# Altium PCB Sampler_DIOT.PCBDOC (part 8 of 10)
Units mm, origin at the board's own origin, x right, y up, seen from the top; angles counter-clockwise.
Board outline 222.9 x 100 mm, 4 copper layers (L1, P2, L3, L4), stack 1.6 mm thick; 697 components, 418 nets, 2175 pads, 1124 vias.
Unrouted connection lines stored in the file: 6.
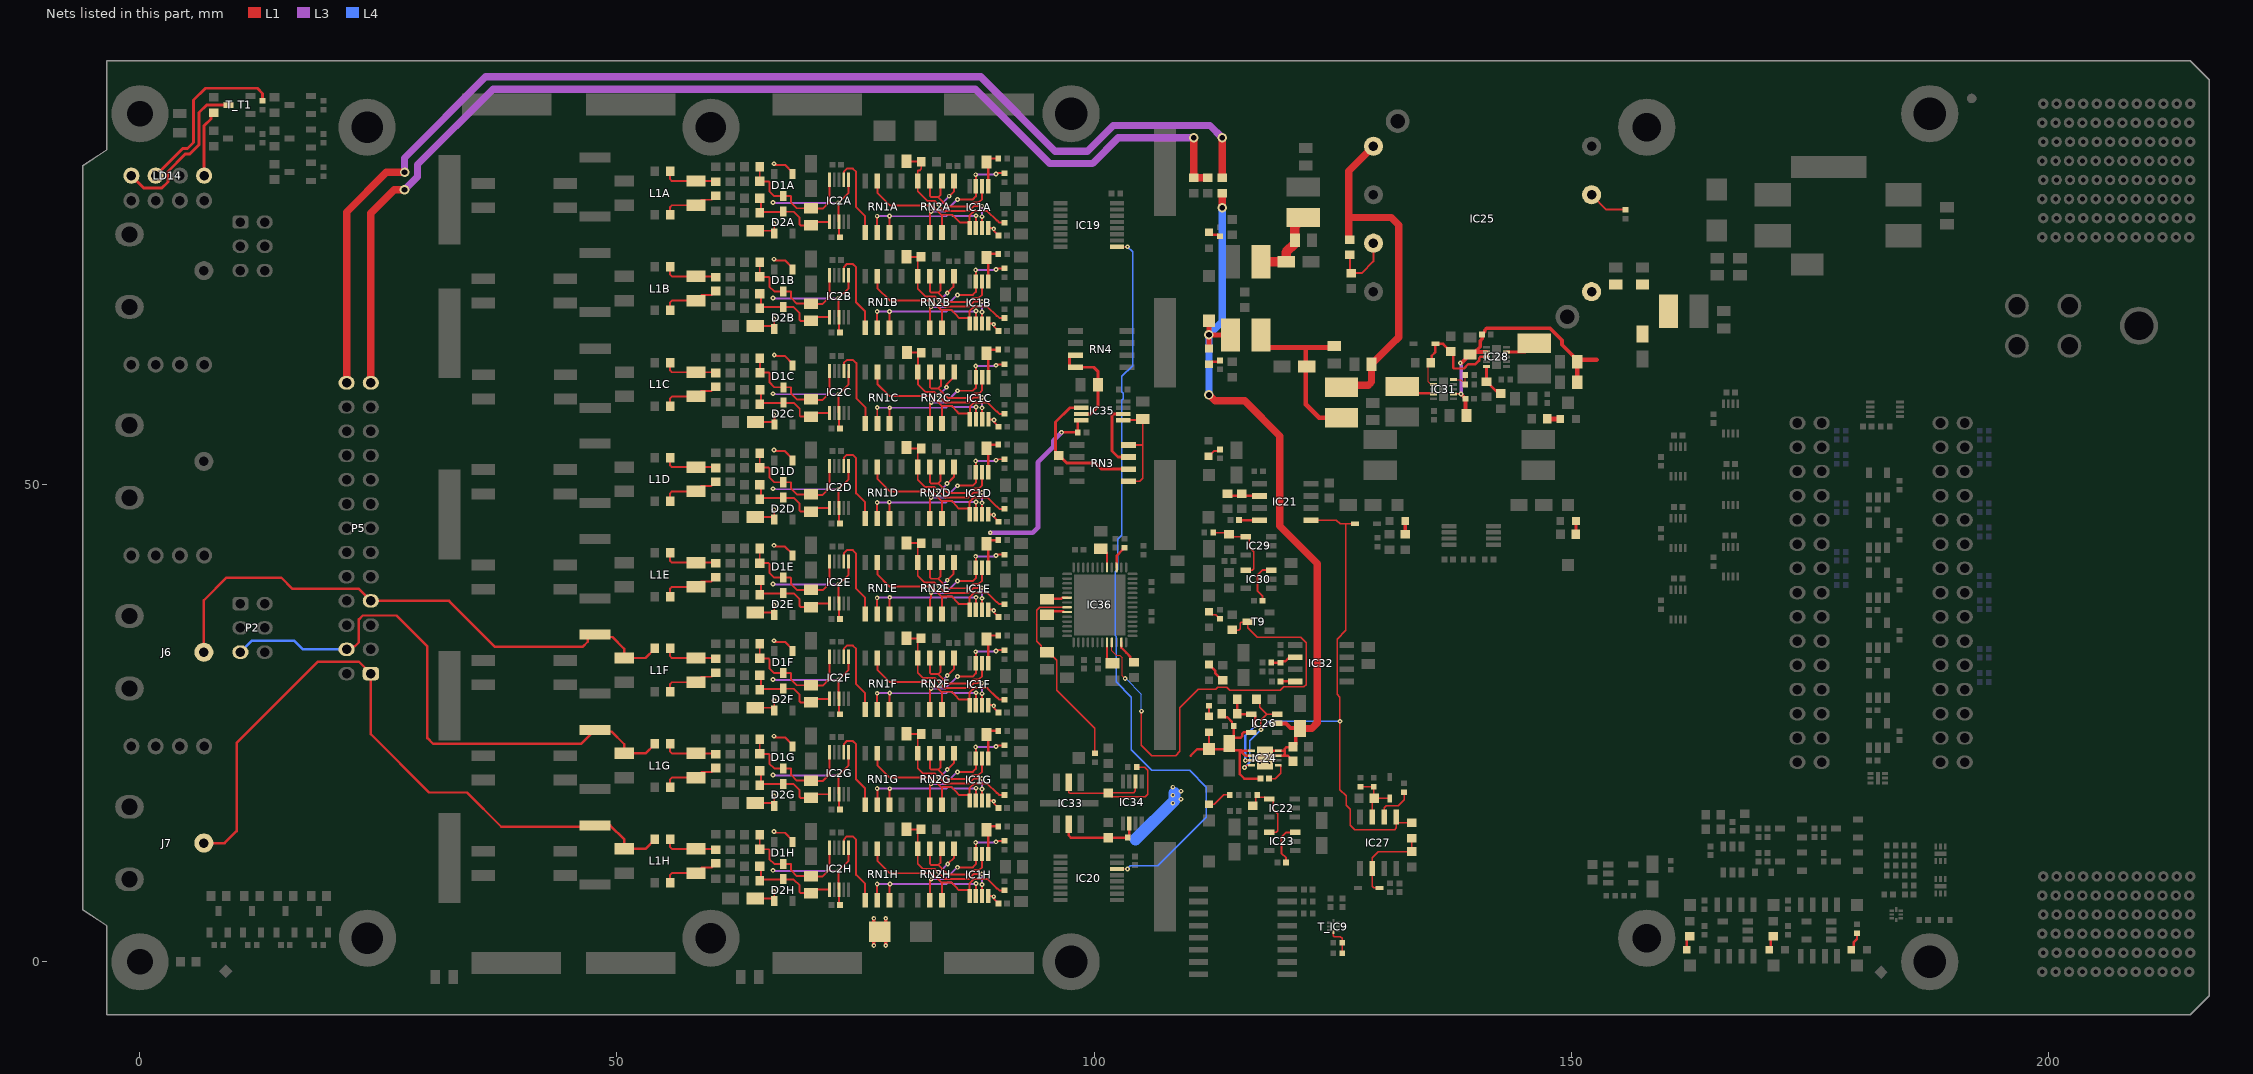
[diagram p8: the nets of this part, all layers, seen from the top]

## Via types
v1: diameter 0.5, hole 0.2, L1 to L4, tented both sides, 1103 vias
v2: diameter 1, hole 0.6, L1 to L4, tented both sides, 15 vias
v3: diameter 0.6, hole 0.3, L1 to L4, tented both sides, 6 vias

## Nets (pads, with @x,y where several pads share a name; then routed paths per layer and width w, separated by ;. In a path a pad name is that pad's centre, name@x,y a point inside that pad or via, vN(x,y) a via of type N, cw(c..) or ccw(c..) an arc to the next point about the centre after c; other vN are vias at no path point) (continued)
IN_P5: J6.1 L1F.1 P5.7 R1F.1 R5F.2 | length 59.5
  L1 w0.254: J6.1@6.7,32.45 6.7,37.9 9.075,40.275 14.8,40.275 15.95,39.125 22.905,39.125 P5.7@24.2,37.83 32.395,37.83 37.217,33.008 46.397,33.008 46.937,33.548 46.937,33.907 47.335,34.305 47.514,34.305 47.776,34.043 49.524,34.043 50.76,32.807 L1F.1@50.76,31.844 52.998,31.844 53.964,32.81 R1F.1@53.964,32.86
IN_P6: L1G.1 P2.5 P5.4 R1G.1 R5G.2 | length 60.9
  L1 w0.254: P5.4@21.66,32.75 22.12,32.75 22.435,33.065 22.516,33.065 22.95,33.5 22.95,35.9 23.35,36.3 26.875,36.3 30.13,33.045 30.13,23.445 30.739,22.836 46.225,22.836 R5G.2@47.694,24.305 ; R5G.2@47.669,24.142 49.425,24.142 50.76,22.807 50.76,21.978 50.894,21.844 52.998,21.844 53.964,22.81 R1G.1@53.964,22.86
  L4 w0.254: P2.5@10.53,32.46 11.745,33.675 16.15,33.675 17.075,32.75 P5.4@21.66,32.75
IN_P7: J7.1 L1H.1 P5.1 R1H.1 R5H.2 | length 73.5
  L1 w0.254: J7.1@6.7,12.45 8.875,12.45 10.125,13.7 10.125,22.95 18.65,31.475 22.935,31.475 23.615,30.795 23.615,30.766 24.171,30.21 P5.1@24.2,30.21 24.2,23.85 30.3,17.75 34.266,17.75 37.861,14.155 R5H.2@47.694,14.155 ; R5H.2@47.694,14.305 49.271,14.305 50.769,12.807 50.769,11.853 L1H.1@50.76,11.844 52.998,11.844 53.964,12.81 R1H.1@53.964,12.86
INT_I2C_OE: T_IC9.5 T_R5.2 T_R6.2 | length 3
  L1 w0.152: T_IC9.5@125.1,3.12 125.1,2.745 125.195,2.65 125.83,2.65 126.02,2.46 T_R6.2@126.02,2 T_R5.2@126.02,0.9
N12V0A: C10A.2 C10B.2 C10C.2 C10D.2 C10E.2 C10F.2 C10G.2 C10H.2 C11A.2 C11B.2 C11C.2 C11D.2 C11E.2 C11F.2 C11G.2 C11H.2 C14A.2 C14B.2 C14C.2 C14D.2 C14E.2 C14F.2 C14G.2 C14H.2 C46.2 C63.2 C64.2 C105.2 D1A.1 D1B.1 D1C.1 D1D.1 D1E.1 D1F.1 D1G.1 D1H.1 D2A.1 D2B.1 D2C.1 D2D.1 D2E.1 D2F.1 D2G.1 D2H.1 D6.2 IC1A.4 IC1B.4 IC1C.4 IC1D.4 IC1E.4 IC1F.4 IC1G.4 IC1H.4 IC2A.3 IC2A.6 IC2B.3 IC2B.6 IC2C.3 IC2C.6 IC2D.3 IC2D.6 IC2E.3 IC2E.6 IC2F.3 IC2F.6 IC2G.3 IC2G.6 IC2H.3 IC2H.6 IC24.1 IC24.2 IC26.5 IC35.4 LD12.1 R61.2 TP9.1 | length 217.2
  L1 w0.203: C11H.2@64.494,6.63 66.209,6.63 D2H.1@66.483,6.356 66.483,7.356 v1(66.444,7.395) ; C11G.2@64.494,16.63 66.209,16.63 D2G.1@66.483,16.356 66.483,17.356 v1(66.444,17.395) ; C11F.2@64.494,26.63 66.209,26.63 D2F.1@66.483,26.356 66.483,27.356 v1(66.444,27.395) ; C11E.2@64.494,36.63 66.209,36.63 D2E.1@66.483,36.356 66.483,37.356 v1(66.444,37.395) ; C11D.2@64.494,46.63 66.209,46.63 D2D.1@66.483,46.356 66.483,47.356 v1(66.444,47.395) ; C11B.2@64.494,66.63 66.209,66.63 D2B.1@66.483,66.356 66.483,67.356 v1(66.444,67.395) ; C11A.2@64.494,76.63 66.209,76.63 D2A.1@66.483,76.356 66.483,77.356 v1(66.444,77.395) ; C11C.2@64.507,56.586 66.222,56.586 D2C.1@66.496,56.312 66.496,57.312 v1(66.457,57.352) ; v1(66.468,13.653) 66.595,13.526 67.611,13.526 68.383,12.754 D1H.1@68.383,12.641 ; v1(66.468,23.653) 66.595,23.526 67.611,23.526 68.383,22.754 D1G.1@68.383,22.641 ; v1(66.468,33.653) 66.595,33.526 67.611,33.526 68.383,32.754 D1F.1@68.383,32.641 ; v1(66.468,43.653) 66.595,43.526 67.611,43.526 68.383,42.754 D1E.1@68.383,42.641 ; v1(66.468,53.653) 66.595,53.526 67.611,53.526 68.383,52.754 D1D.1@68.383,52.641 ; v1(66.468,73.653) 66.595,73.526 67.611,73.526 68.383,72.754 D1B.1@68.383,72.641 ; v1(66.468,83.653) 66.595,83.526 67.611,83.526 68.383,82.754 D1A.1@68.383,82.641 ; v1(66.481,63.609) 66.608,63.482 67.624,63.482 68.396,62.71 D1C.1@68.396,62.597 ; D1H.1@68.383,12.568 D1H.1@68.383,12.641 ; D1G.1@68.383,22.568 D1G.1@68.383,22.641 ; D1F.1@68.383,32.568 D1F.1@68.383,32.641 ; D1E.1@68.383,42.568 D1E.1@68.383,42.641 ; D1D.1@68.383,52.568 D1D.1@68.383,52.641 ; D1B.1@68.383,72.568 D1B.1@68.383,72.641 ; D1A.1@68.383,82.568 D1A.1@68.383,82.641 ; D1C.1@68.396,62.524 D1C.1@68.396,62.597 ; D1H.1@68.455,12.688 68.396,12.628 D1H.1@68.383,12.641 ; D1G.1@68.455,22.688 68.396,22.628 D1G.1@68.383,22.641 ; D1F.1@68.455,32.688 68.396,32.628 D1F.1@68.383,32.641 ; D1E.1@68.455,42.688 68.396,42.628 D1E.1@68.383,42.641 ; D1D.1@68.455,52.688 68.396,52.628 D1D.1@68.383,52.641 ; D1B.1@68.455,72.688 68.396,72.628 D1B.1@68.383,72.641 ; D1A.1@68.455,82.688 68.396,82.628 D1A.1@68.383,82.641 ; D1C.1@68.468,62.644 68.408,62.585 D1C.1@68.396,62.597 ; C10H.2@73.215,6.098 C10H.2@73.275,6.038 ; C10G.2@73.215,16.098 C10G.2@73.275,16.038 ; C10F.2@73.215,26.098 C10F.2@73.275,26.038 ; C10E.2@73.215,36.098 C10E.2@73.275,36.038 ; C10D.2@73.215,46.098 C10D.2@73.275,46.038 ; C10B.2@73.215,66.098 C10B.2@73.275,66.038 ; C10A.2@73.215,76.098 C10A.2@73.275,76.038 ; C10C.2@73.228,56.054 C10C.2@73.288,55.994 ; C10H.2@73.365,5.948 C10H.2@73.275,6.038 ; C10G.2@73.365,15.948 C10G.2@73.275,16.038 ; C10F.2@73.365,25.948 C10F.2@73.275,26.038 ; C10E.2@73.365,35.948 C10E.2@73.275,36.038 ; C10D.2@73.365,45.948 C10D.2@73.275,46.038 ; C10B.2@73.365,65.948 C10B.2@73.275,66.038 ; C10A.2@73.365,75.948 C10A.2@73.275,76.038 ; C10C.2@73.378,55.904 C10C.2@73.288,55.994 ; IC2H.6@74.275,11.967 74.275,10.596 v1(73.215,9.536) 73.215,8.7 73.227,8.688 73.227,7.615 73.275,7.567 C10H.2@73.275,6.038 ; IC2G.6@74.275,21.967 74.275,20.596 v1(73.215,19.536) 73.215,18.7 73.227,18.688 73.227,17.615 73.275,17.567 C10G.2@73.275,16.038 ; IC2F.6@74.275,31.967 74.275,30.596 v1(73.215,29.536) 73.215,28.7 73.227,28.688 73.227,27.615 73.275,27.567 C10F.2@73.275,26.038 ; IC2E.6@74.275,41.967 74.275,40.596 v1(73.215,39.536) 73.215,38.7 73.227,38.688 73.227,37.615 73.275,37.567 C10E.2@73.275,36.038 ; IC2D.6@74.275,51.967 74.275,50.596 v1(73.215,49.536) 73.215,48.7 73.227,48.688 73.227,47.615 73.275,47.567 C10D.2@73.275,46.038 ; IC2B.6@74.275,71.967 74.275,70.596 v1(73.215,69.536) 73.215,68.7 73.227,68.688 73.227,67.615 73.275,67.567 C10B.2@73.275,66.038 ; IC2A.6@74.275,81.967 74.275,80.596 v1(73.215,79.536) 73.215,78.7 73.227,78.688 73.227,77.615 73.275,77.567 C10A.2@73.275,76.038 ; IC2C.6@74.288,61.923 74.288,60.553 v1(73.228,59.493) 73.228,58.656 73.239,58.644 73.239,57.571 IC2C.3@73.288,57.523 C10C.2@73.288,55.994 ; IC1H.4@88.919,6.909 89.415,6.909 v1(89.494,6.83) 89.494,6.63 C14H.2@89.994,6.13 ; IC1G.4@88.919,16.909 89.415,16.909 v1(89.494,16.83) 89.494,16.63 C14G.2@89.994,16.13 ; IC1F.4@88.919,26.909 89.415,26.909 v1(89.494,26.83) 89.494,26.63 C14F.2@89.994,26.13 ; IC1E.4@88.919,36.909 89.415,36.909 v1(89.494,36.83) 89.494,36.63 C14E.2@89.994,36.13 ; IC1D.4@88.919,46.909 89.415,46.909 v1(89.494,46.83) 89.494,46.63 C14D.2@89.994,46.13 ; IC1B.4@88.919,66.909 89.415,66.909 v1(89.494,66.83) 89.494,66.63 C14B.2@89.994,66.13 ; IC1A.4@88.919,76.909 89.415,76.909 v1(89.494,76.83) 89.494,76.63 C14A.2@89.994,76.13 ; IC1C.4@88.932,56.865 89.428,56.865 v1(89.507,56.786) 89.507,56.586 C14C.2@90.007,56.086
  L1 w0.25: v1(96.6,55.5) C105.2@98.3,55.5 98.3,56.675 98.4,56.775 IC35.4@98.675,56.775 ; 110.125,21.6 110.815,22.29 TP9.1@112.05,22.29 ; LD12.1@112.05,24.075 TP9.1@112.05,22.29 ; R61.2@113.4,26.025 113.4,25.975 113.725,25.65 113.775,25.65 113.966,25.65 114.465,25.151 114.465,24.885 C64.2@114.65,24.7 C63.2@114.65,23.348 ; IC26.5@116.487,24.047 115.671,24.047 115.525,23.9 115.525,23.644 115.379,23.498 114.8,23.498 C63.2@114.65,23.348 ; IC24.2@116.512,21.61 116.071,21.61 116.069,21.612 115.838,21.612 115.55,21.9 115.55,22.054 ; IC24.1@116.512,22.11 115.606,22.11 115.55,22.054 ; C46.2@117.462,19.2 115.75,19.2 115.275,19.675 115.275,22.137 115.25,22.162 ; TP9.1@112.05,22.29 113.8,22.29 C63.2@114.3,22.79 ; C63.2@114.3,22.79 114.3,22.9 114.65,23.25 C63.2@114.65,23.348 ; C63.2@114.3,22.79 114.3,22.662 114.8,22.162 115.25,22.162 ; 115.25,22.162 115.441,22.162 115.55,22.054
  L1 w0.35: v1(76.919,1.7) D6.2@76.919,2.605 ; D6.2@76.919,3.655 v1(76.919,4.56) ; v1(78.169,1.7) D6.2@78.169,2.605 ; D6.2@78.169,3.655 v1(78.169,4.56)
  L3 w0.203: v1(66.341,9.589) 66.394,9.536 v1(73.215,9.536) ; v1(66.341,19.589) 66.394,19.536 v1(73.215,19.536) ; v1(66.341,29.589) 66.394,29.536 v1(73.215,29.536) ; v1(66.341,39.589) 66.394,39.536 v1(73.215,39.536) ; v1(66.341,49.589) 66.394,49.536 v1(73.215,49.536) ; v1(66.341,69.589) 66.394,69.536 v1(73.215,69.536) ; v1(66.341,79.589) 66.394,79.536 v1(73.215,79.536) ; v1(66.354,59.545) 66.406,59.493 v1(73.228,59.493)
  L3 w0.5: v1(89.125,44.975) 93.589,44.975 94.125,45.511 94.125,52.375 95.725,53.975 95.725,54.625 v1(96.6,55.5)
  L4 w1.27: 104.35,12.85 108.45,16.95 108.45,17.7
  other v1: 108.263,16.632 109.125,17.05 108.263,17.469 109.125,17.887 108.263,18.306
N13V0: C26.2 C61.2 C62.2 IC24.7 IC24.8 IC24.9 IC26.2 L6.2 LD13.1 R42.2 TP20.1 | length 80.4
  L1 w0.25: IC24.9@118.614,21.61 IC24.7@119.312,21.61 119.835,21.61 ; IC24.9@118.614,22.11 IC24.8@119.312,22.11 120.01,22.11 ; C26.2@120.878,21.01 120.878,21.035 120.303,21.61 119.835,21.61 ; C61.2@120.878,22.535 120.843,22.5 120.175,22.5 120.01,22.335 120.01,22.11 ; 119.835,21.61 120.01,21.785 120.01,22.11
  L1 w0.4: IC26.2@119.187,24.997 120.115,24.997 120.587,24.525 121.153,24.525 121.277,24.401 121.277,24.159 C62.2@121.578,24.46 121.578,24.185 121.152,23.759 121.152,22.809 C61.2@120.878,22.535
  L1 w0.5: LD13.1@112.05,64.285 v2(112.05,65.725) TP20.1@112.05,66.895
  L1 w0.508: v2(112.05,65.725) 112.075,65.7 L6.2@114.2,65.7
  L1 w0.762: v2(112.05,59.425) 112.676,58.799 115.802,58.799 119.481,55.12 119.481,45.684 123.405,41.76 123.405,25.055 122.81,24.46 C62.2@121.578,24.46 ; R42.2@113.444,80.58 113.444,79.081 v2@113.475,79.05
  L4 w0.762: v2(112.05,59.425) v2(112.05,65.725) 113.444,67.119 v2(113.444,79.055)
  other v1: 117.412,20.86 118.412,20.86 117.412,21.86 118.412,21.86
N13V0S: C58.2 IC25.4 L5.1 R58.1 | length 42.8
  L1 w0.203: L5.1@125.944,60.23 128.544,60.23 128.744,60.43 128.944,60.63 128.944,62.48 C58.2@129.094,62.63
  L1 w0.762: L5.1@125.944,60.23 126.144,60.43 128.744,60.43 ; R58.1@126.694,75.68 126.763,75.749 R58.1@126.813,75.749 ; R58.1@126.813,75.699 126.763,75.699 126.738,75.724 126.694,75.768 126.694,78.33 ; 128.944,60.63 129.094,60.78 C58.2@129.094,62.63 131.194,64.73 131.944,65.48 131.944,77.235 131.149,78.03 126.994,78.03 126.694,78.33 ; IC25.4@129.294,85.485 126.694,82.885 126.694,78.33
NetC1A_2: C1A.2 C2A.2 D1A.3 IC2A.10 R3A.2 | length 13.5
  L1 w0.203: R3A.2@64.962,83.322 C1A.2@64.962,81.798 65.903,81.798 65.983,81.718 65.983,80.768 66.483,80.268 D1A.3@67.433,80.268 68.202,80.268 68.246,80.224 68.246,79.589 68.845,78.99 C2A.2@70.329,78.99 70.365,78.954 71.548,78.954 72.275,79.681 IC2A.10@72.275,81.967
NetC1B_2: C1B.2 C2B.2 D1B.3 IC2B.10 R3B.2 | length 13.5
  L1 w0.203: R3B.2@64.962,73.322 C1B.2@64.962,71.798 65.903,71.798 65.983,71.718 65.983,70.768 66.483,70.268 D1B.3@67.433,70.268 68.202,70.268 68.246,70.224 68.246,69.589 68.845,68.99 C2B.2@70.329,68.99 70.365,68.954 71.548,68.954 72.275,69.681 IC2B.10@72.275,71.967
NetC1C_2: C1C.2 C2C.2 D1C.3 IC2C.10 R3C.2 | length 13.5
  L1 w0.203: R3C.2@64.975,63.278 C1C.2@64.975,61.754 65.916,61.754 65.996,61.674 65.996,60.724 66.496,60.224 D1C.3@67.446,60.224 68.215,60.224 68.259,60.18 68.259,59.545 68.857,58.947 C2C.2@70.341,58.947 70.378,58.91 71.561,58.91 72.288,59.637 IC2C.10@72.288,61.923
NetC1D_2: C1D.2 C2D.2 D1D.3 IC2D.10 R3D.2 | length 13.5
  L1 w0.203: R3D.2@64.962,53.322 C1D.2@64.962,51.798 65.903,51.798 65.983,51.718 65.983,50.768 66.483,50.268 D1D.3@67.433,50.268 68.202,50.268 68.246,50.224 68.246,49.589 68.845,48.99 C2D.2@70.329,48.99 70.365,48.954 71.548,48.954 72.275,49.681 IC2D.10@72.275,51.967
NetC1E_2: C1E.2 C2E.2 D1E.3 IC2E.10 R3E.2 | length 13.5
  L1 w0.203: R3E.2@64.962,43.322 C1E.2@64.962,41.798 65.903,41.798 65.983,41.718 65.983,40.768 66.483,40.268 67.433,40.268 68.202,40.268 68.246,40.224 68.246,39.589 68.845,38.99 C2E.2@70.329,38.99 70.365,38.954 71.548,38.954 72.275,39.681 IC2E.10@72.275,41.967
NetC1F_2: C1F.2 C2F.2 D1F.3 IC2F.10 R3F.2 | length 13.5
  L1 w0.203: R3F.2@64.962,33.322 C1F.2@64.962,31.798 65.903,31.798 65.983,31.718 65.983,30.768 66.483,30.268 D1F.3@67.433,30.268 68.202,30.268 68.246,30.224 68.246,29.589 68.845,28.99 C2F.2@70.329,28.99 70.365,28.954 71.548,28.954 72.275,29.681 IC2F.10@72.275,31.967
NetC1G_2: C1G.2 C2G.2 D1G.3 IC2G.10 R3G.2 | length 13.5
  L1 w0.203: R3G.2@64.962,23.322 C1G.2@64.962,21.798 65.903,21.798 65.983,21.718 65.983,20.768 66.483,20.268 D1G.3@67.433,20.268 68.202,20.268 68.246,20.224 68.246,19.589 68.845,18.99 C2G.2@70.329,18.99 70.365,18.954 71.548,18.954 72.275,19.681 IC2G.10@72.275,21.967
NetC1H_2: C1H.2 C2H.2 D1H.3 IC2H.10 R3H.2 | length 13.5
  L1 w0.203: R3H.2@64.962,13.322 C1H.2@64.962,11.798 65.903,11.798 65.983,11.718 65.983,10.768 66.483,10.268 D1H.3@67.433,10.268 68.202,10.268 68.246,10.224 68.246,9.589 68.845,8.99 C2H.2@70.329,8.99 70.365,8.954 71.548,8.954 72.275,9.681 IC2H.10@72.275,11.967
NetC2A_1: C2A.1 C5A.2 D2A.3 IC2A.1 R10A.2 | length 9.7
  L1 w0.203: C5A.2@65.082,79.9 65.082,78.616 67.393,78.616 D2A.3@67.399,78.622 ; D2A.3@67.433,78.656 D2A.3@67.399,78.622 ; IC2A.1@72.275,77.567 70.705,77.567 C2A.1@70.329,77.19 69.249,77.19 69.142,77.298 69.142,78.004 68.524,78.622 D2A.3@67.399,78.622
NetC2B_1: C2B.1 C5B.2 D2B.3 IC2B.1 R10B.2 | length 9.7
  L1 w0.203: C5B.2@65.082,69.9 65.082,68.616 67.393,68.616 D2B.3@67.399,68.622 ; D2B.3@67.433,68.656 D2B.3@67.399,68.622 ; IC2B.1@72.275,67.567 70.705,67.567 C2B.1@70.329,67.19 69.249,67.19 69.142,67.298 69.142,68.004 68.524,68.622 D2B.3@67.399,68.622
NetC2C_1: C2C.1 C5C.2 D2C.3 IC2C.1 R10C.2 | length 9.7
  L1 w0.203: C5C.2@65.095,59.856 65.095,58.572 67.406,58.572 D2C.3@67.412,58.578 ; D2C.3@67.446,58.612 D2C.3@67.412,58.578 ; IC2C.1@72.288,57.523 70.718,57.523 C2C.1@70.341,57.147 69.262,57.147 69.154,57.254 69.154,57.96 68.536,58.578 D2C.3@67.412,58.578
NetC2D_1: C2D.1 C5D.2 D2D.3 IC2D.1 R10D.2 | length 9.7
  L1 w0.203: C5D.2@65.082,49.9 65.082,48.616 67.393,48.616 D2D.3@67.399,48.622 ; D2D.3@67.433,48.656 D2D.3@67.399,48.622 ; IC2D.1@72.275,47.567 70.705,47.567 C2D.1@70.329,47.19 69.249,47.19 69.142,47.298 69.142,48.004 68.524,48.622 D2D.3@67.399,48.622
NetC2E_1: C2E.1 C5E.2 D2E.3 IC2E.1 R10E.2 | length 9.7
  L1 w0.203: C5E.2@65.082,39.9 65.082,38.616 67.393,38.616 D2E.3@67.399,38.622 ; D2E.3@67.433,38.656 D2E.3@67.399,38.622 ; IC2E.1@72.275,37.567 70.705,37.567 C2E.1@70.329,37.19 69.249,37.19 69.142,37.298 69.142,38.004 68.524,38.622 D2E.3@67.399,38.622
NetC2F_1: C2F.1 C5F.2 D2F.3 IC2F.1 R10F.2 | length 9.7
  L1 w0.203: C5F.2@65.082,29.9 65.082,28.616 67.393,28.616 D2F.3@67.399,28.622 ; D2F.3@67.433,28.656 D2F.3@67.399,28.622 ; IC2F.1@72.275,27.567 70.705,27.567 C2F.1@70.329,27.19 69.249,27.19 69.142,27.298 69.142,28.004 68.524,28.622 D2F.3@67.399,28.622
NetC2G_1: C2G.1 C5G.2 D2G.3 IC2G.1 R10G.2 | length 9.7
  L1 w0.203: C5G.2@65.082,19.9 65.082,18.616 67.393,18.616 D2G.3@67.399,18.622 ; D2G.3@67.433,18.656 D2G.3@67.399,18.622 ; IC2G.1@72.275,17.567 70.705,17.567 C2G.1@70.329,17.19 69.249,17.19 69.142,17.298 69.142,18.004 68.524,18.622 D2G.3@67.399,18.622
NetC2H_1: C2H.1 C5H.2 D2H.3 IC2H.1 R10H.2 | length 9.7
  L1 w0.203: C5H.2@65.082,9.9 65.082,8.616 67.393,8.616 D2H.3@67.399,8.622 ; D2H.3@67.433,8.656 D2H.3@67.399,8.622 ; IC2H.1@72.275,7.567 70.705,7.567 C2H.1@70.329,7.19 69.249,7.19 69.142,7.298 69.142,8.004 68.524,8.622 D2H.3@67.399,8.622
NetC3A_2: C3A.2 IC1A.3 R7A.2 RN2A.1 RN2A.4 | length 18.6
  L1 w0.203: C3A.2@80.369,83.655 C3A.2@80.369,83.905 81.869,83.905 R7A.2@81.894,83.88 81.894,83.105 81.739,82.95 81.524,82.95 RN2A.4@81.524,81.855 81.524,80.775 82.544,79.755 83.294,79.755 v1@83.694,79.355 ; v1(83.744,79.355) v1@83.694,79.355 ; v1(84.819,80.255) 85.334,80.77 RN2A.1@85.334,81.855 ; v1(88.244,79.205) 87.394,79.205 86.869,78.68 84.369,78.68 v1@83.694,79.355 ; v1(88.248,78.109) 88.269,78.088 IC1A.3@88.269,76.909
  L3 w0.203: v1(83.744,79.355) 83.919,79.355 v1(84.819,80.255) ; v1(88.244,79.205) 88.248,79.201 v1(88.248,78.109)
NetC3B_2: C3B.2 IC1B.3 R7B.2 RN2B.1 RN2B.4 | length 18.2
  L1 w0.203: C3B.2@80.369,73.905 80.394,73.88 81.844,73.88 81.524,73.56 RN2B.4@81.524,71.855 81.524,70.555 82.324,69.755 83.294,69.755 v1(83.832,69.217) 84.369,68.68 86.869,68.68 87.394,69.205 v1(88.244,69.205) ; v1(84.619,70.105) 85.269,70.755 85.269,71.79 RN2B.1@85.334,71.855 ; v1(88.248,68.109) 88.269,68.088 IC1B.3@88.269,66.909
  L3 w0.203: v1(83.832,69.217) 83.832,69.318 v1(84.619,70.105) ; v1(88.244,69.205) 88.248,69.201 v1(88.248,68.109)
NetC3C_2: C3C.2 IC1C.3 R7C.2 RN2C.1 RN2C.4 | length 18.1
  L1 w0.203: C3C.2@80.382,63.861 80.388,63.855 R7C.2@81.894,63.855 81.537,63.498 RN2C.4@81.537,61.812 81.537,60.53 82.356,59.711 83.307,59.711 83.666,59.352 84.382,58.636 86.882,58.636 87.407,59.161 v1(88.257,59.161) ; v1(84.544,60.23) 84.544,60.53 85.347,61.333 RN2C.1@85.347,61.812 ; v1(88.261,58.065) 88.282,58.045 IC1C.3@88.282,56.865
  L3 w0.203: v1(83.694,59.38) v1(84.544,60.23) ; v1(88.257,59.161) 88.261,59.157 v1(88.261,58.065)
NetC3D_2: C3D.2 IC1D.3 R7D.2 RN2D.1 RN2D.4 | length 18.2
  L1 w0.203: C3D.2@80.369,53.905 80.469,53.805 R7D.2@81.894,53.805 81.524,53.435 RN2D.4@81.524,51.855 81.524,50.546 82.316,49.755 83.294,49.755 v1(83.719,49.33) 84.369,48.68 86.869,48.68 87.394,49.205 v1(88.244,49.205) ; v1(84.594,50.13) 85.334,50.87 RN2D.1@85.334,51.855 ; v1(88.248,48.109) 88.269,48.088 IC1D.3@88.269,46.909
  L3 w0.203: v1(83.719,49.33) 83.794,49.33 v1(84.594,50.13) ; v1(88.244,49.205) 88.248,49.201 v1(88.248,48.109)
NetC3E_2: C3E.2 IC1E.3 R7E.2 RN2E.1 RN2E.4 | length 18.3
  L1 w0.203: C3E.2@80.369,43.905 80.394,43.88 R7E.2@81.894,43.88 81.524,43.51 RN2E.4@81.524,41.855 81.524,40.467 82.237,39.755 83.294,39.755 83.757,39.292 84.369,38.68 86.869,38.68 87.394,39.205 v1(88.244,39.205) ; v1(84.619,40.005) 85.294,40.68 85.294,41.815 RN2E.1@85.334,41.855 ; v1(88.248,38.109) 88.269,38.088 IC1E.3@88.269,36.909
  L3 w0.203: v1(83.794,39.33) 83.944,39.33 v1(84.619,40.005) ; v1(88.244,39.205) 88.248,39.201 v1(88.248,38.109)
NetC3F_2: C3F.2 IC1F.3 R7F.2 RN2F.1 RN2F.4 | length 18.4
  L1 w0.203: C3F.2@80.369,33.905 R7F.2@81.869,33.905 81.524,33.56 RN2F.4@81.524,31.855 81.524,30.3 82.069,29.755 83.294,29.755 83.912,29.137 84.369,28.68 86.869,28.68 87.394,29.205 v1(88.244,29.205) ; v1(84.619,30.005) 85.334,30.72 RN2F.1@85.334,31.855 ; v1(88.248,28.109) 88.269,28.088 IC1F.3@88.269,26.909
  L3 w0.203: v1(83.929,29.155) 83.929,29.315 v1(84.619,30.005) ; v1(88.244,29.205) 88.248,29.201 v1(88.248,28.109)
NetC3G_2: C3G.2 IC1G.3 R7G.2 RN2G.1 RN2G.4 | length 18.4
  L1 w0.203: C3G.2@80.369,23.905 80.394,23.88 R7G.2@81.894,23.88 81.524,23.51 RN2G.4@81.524,21.855 81.524,20.3 82.069,19.755 83.294,19.755 v1(83.744,19.305) 84.369,18.68 86.869,18.68 87.394,19.205 v1(88.244,19.205) ; v1(84.619,20.155) 85.334,20.87 RN2G.1@85.334,21.855 ; v1(88.248,18.109) 88.269,18.088 IC1G.3@88.269,16.909
  L3 w0.203: v1(83.744,19.305) 83.769,19.305 v1(84.619,20.155) ; v1(88.244,19.205) 88.248,19.201 v1(88.248,18.109)
NetC3H_2: C3H.2 IC1H.3 R7H.2 RN2H.1 RN2H.4 | length 18.3
  L1 w0.203: C3H.2@80.394,13.88 R7H.2@81.869,13.88 81.524,13.535 RN2H.4@81.524,11.855 81.524,10.3 82.069,9.755 83.294,9.755 83.669,9.38 84.369,8.68 86.869,8.68 87.394,9.205 v1(88.244,9.205) ; v1(84.669,10.255) 85.334,10.92 RN2H.1@85.334,11.855 ; v1(88.248,8.109) 88.269,8.088 IC1H.3@88.269,6.909
  L3 w0.203: v1(83.694,9.405) 83.819,9.405 v1(84.669,10.255) ; v1(88.244,9.205) 88.248,9.201 v1(88.248,8.109)
NetC12A_2: C12A.2 IC1A.5 R13A.2 | length 4
  L1 w0.254: IC1A.5@88.919,81.309 88.919,83.655 C12A.2@88.744,83.83 89.119,84.205 R13A.2@89.974,84.205
NetC12B_2: C12B.2 IC1B.5 R13B.2 | length 4
  L1 w0.254: IC1B.5@88.919,71.309 88.919,73.655 C12B.2@88.744,73.83 89.119,74.205 R13B.2@89.974,74.205
NetC12C_2: C12C.2 IC1C.5 R13C.2 | length 4
  L1 w0.254: IC1C.5@88.932,61.265 88.932,63.611 C12C.2@88.757,63.786 89.132,64.161 R13C.2@89.987,64.161
NetC12D_2: C12D.2 IC1D.5 R13D.2 | length 4
  L1 w0.254: IC1D.5@88.919,51.309 88.919,53.655 C12D.2@88.744,53.83 89.119,54.205 R13D.2@89.974,54.205
NetC12E_2: C12E.2 IC1E.5 R13E.2 | length 4
  L1 w0.254: IC1E.5@88.919,41.309 88.919,43.655 C12E.2@88.744,43.83 89.119,44.205 R13E.2@89.974,44.205
NetC12F_2: C12F.2 IC1F.5 R13F.2 | length 4
  L1 w0.254: IC1F.5@88.919,31.309 88.919,33.655 C12F.2@88.744,33.83 89.119,34.205 R13F.2@89.974,34.205
NetC12G_2: C12G.2 IC1G.5 R13G.2 | length 4
  L1 w0.254: IC1G.5@88.919,21.309 88.919,23.655 C12G.2@88.744,23.83 89.119,24.205 R13G.2@89.974,24.205
NetC12H_2: C12H.2 IC1H.5 R13H.2 | length 4
  L1 w0.254: IC1H.5@88.919,11.309 88.919,13.655 C12H.2@88.744,13.83 89.119,14.205 R13H.2@89.974,14.205
NetC40_2: C40.2 IC21.4 | length 2.1
  L1 w0.25: C40.2@115.193,46.298 IC21.4@117.334,46.298
NetC42_1: C42.1 IC23.3 | length 4.6
  L1 w0.203: C42.1@120.144,10.369 120.144,10.885 119.644,11.385 119.644,13.069 120.144,13.569 IC23.3@121.094,13.569
NetC46_1: C46.1 IC24.5 | length 2.5
  L1 w0.152: C46.1@118.362,19.2 119,19.2 119.582,19.783 119.582,20.561 119.534,20.61 IC24.5@119.312,20.61
NetC49_2: C49.2 C50.1 L2.2 L3.1 | length 8
  L1 w1.016: L3.1@117.5,73.4 117.52,73.38 C50.1@120.144,73.38 120.144,74.38 121.044,75.28 121.044,77.13 L2.2@121.944,78.03
NetC52_1: C52.1 C53.2 C54.2 C55.2 C56.2 C73.2 C74.2 C85.2 C86.2 IC25.1 IC28.2 IC31.2 L4.2 | length 29.1
  L1 w0.152: IC31.2@137.691,59.52 v1(138.481,59.52)
  L1 w0.381: v1(138.391,62.77) 138.523,62.77 C74.2@139.409,63.655 139.645,63.655 C74.2@139.904,63.915 ; v1(138.481,59.52) 138.481,59.48 C85.2@138.941,59.02 138.941,57.37 C86.2@139.041,57.27 ; IC28.2@141.142,63.915 C74.2@139.904,63.915 ; C55.2@150.653,62.901 150.653,63.076 149.06,64.669 149.06,65.139 147.802,66.397 141.149,66.397 140.963,66.211 140.963,66.042 C73.2@140.691,65.77 140.691,65.295 140.475,65.079 140.475,64.486 C74.2@139.904,63.915 ; L4.2@160.1,68.3 L4.2@160.2,68.2
  L1 w0.508: C56.2@150.653,60.742 C55.2@150.653,62.901 150.865,63.113 152.66,63.113
  L1 w0.762: IC25.1@152.154,70.245 IC25.1@152.489,70.245 ; C52.1@157.5,65.8 C52.1@157.5,66.075
  L3 w0.381: v1(138.391,62.77) 138.391,62.737 138.481,62.647 v1(138.481,59.52)
NetC59_2: C59.2 C60.2 L5.2 L6.1 | length 17.9
  L1 w0.508: L6.1@117.4,64.375 122.194,64.375 ; C59.2@125.039,64.375 122.194,64.375 ; L5.2@125.944,57.03 123.595,57.03 122.194,58.431 122.194,62.4 122.194,64.375
NetC65_2: C65.2 D7.2 IC27.3 R59.1 R62.2 | length 6.3
  L1 w0.152: R59.1@127.925,18.35 R62.2@129.325,18.35 129.325,17.175 C65.2@129.375,17.125 ; IC27.3@129.151,15.192 129.151,16.901 C65.2@129.375,17.125 ; D7.2@131.011,17.102 130.988,17.125 C65.2@129.375,17.125
NetC66_2: C66.2 D8.2 IC28.3 IC31.7 R64.1 | length 13.1
  L1 w0.127: R64.1@135.291,62.795 135.316,62.77 135.378,62.77 135.441,62.77 135.378,62.707 135.05,62.379 135.05,60.791 135.235,60.606 135.504,60.606 IC31.7@135.591,60.52
  L1 w0.254: R64.1@135.291,62.795 135.353,62.857 135.398,62.902 135.398,63.527 135.788,63.917 135.788,64.763 D8.2@135.781,64.77 ; D8.2@135.788,64.77 136.591,64.77 C66.2@137.391,63.97 137.641,63.72 137.641,62.27 137.718,62.193 138.776,62.193 139.233,62.649 139.987,62.649 140.363,63.025 140.363,63.27 140.508,63.415 IC28.3@141.142,63.415
NetC72_2: C72.2 D9.2 IC27.6 R67.1 | length 9.7
  L1 w0.152: D9.2@129.926,7.742 129.333,7.742 129.15,7.925 129.15,10.925 129.775,11.55 C72.2@133.325,11.55 R67.1@133.325,12.967
NetC75_1: C75.1 IC30.3 | length 4.6
  L1 w0.203: C75.1@117.65,37.85 117.65,38.367 117.15,38.867 117.15,40.55 117.65,41.05 IC30.3@118.6,41.05
NetC82_2: C82.2 IC32.4 | length 1.5
  L1 w0.25: C82.2@119.546,29.389 IC32.4@121.096,29.389
NetC95_2: C95.2 IC36.22 | length 2.5
  L1 w0.254: IC36.22@101.364,33.49 101.364,31.703 101.787,31.28 C95.2@101.944,31.28
NetC96_2: C96.2 IC36.9 | length 2.3
  L1 w0.254: C96.2@95.069,36.366 95.464,36.761 96.748,36.761 96.844,36.665 IC36.9@97.189,36.665
NetC97_2: C97.2 IC36.6 | length 2.2
  L1 w0.254: C97.2@95.069,37.995 95.135,38.062 96.56,38.062 96.664,38.165 IC36.6@97.189,38.165
NetC98_2: C98.2 IC36.45 | length 2.2
  L1 w0.254: C98.2@100.915,43.321 101.364,42.871 IC36.45@101.364,41.34
NetC99_2: C99.2 IC36.8 R81.2 | length 21.1
  L1 w0.152: C99.2@95.069,32.442 95.543,31.968 95.732,31.968 96.091,31.609 96.091,28.484 100.1,24.475 R81.2@100.1,21.87 ; C99.2@95.15,32.525 94.845,32.525 94.454,32.916 94.454,33.121 93.993,33.582 93.993,36.853 94.306,37.165 IC36.8@97.189,37.165
NetC101_2: C101.2 IC33.2 IC34.2 R80.2 | length 9.2
  L1 w0.127: R80.2@103.694,13.093 103.614,13.013 R80.2@103.762,13.013
  L1 w0.25: IC33.2@97.344,14.434 97.344,13.24 97.571,13.013 R80.2@103.551,13.013 R80.2@103.614,13.013 ; R80.2@103.694,13.093 IC34.2@103.694,14.505
NetC102_2: C102.2 IC33.6 IC34.6 R82.1 | length 17.6
  L1 w0.152: IC33.6@97.344,18.834 97.344,17.745 97.433,17.656 101.439,17.656 C102.2@101.483,17.7 ; IC34.6@104.344,18.905 104.344,17.929 104.155,17.74 101.523,17.74 C102.2@101.483,17.7 ; R82.1@104.344,20.262 R82.1@104.491,20.409 105.316,20.409 105.625,20.1 105.625,17.55 105.376,17.301 101.882,17.301 101.545,17.638 C102.2@101.483,17.7
NetC103_2: C103.2 IC35.5 RN3.5 RN3.8 | length 11.2
  L1 w0.203: IC35.5@103.075,56.775 104.886,56.775 C103.2@105.111,57 ; RN3.5@103.625,50.37 104.772,50.37 105.111,50.709 105.111,54.18 ; RN3.8@103.625,54.18 105.111,54.18 ; C103.2@105.111,56.639 105.111,54.18
NetC106_2: C106.2 IC35.3 RN4.3 RN4.4 | length 10.8
  L1 w0.3: RN4.4@97.431,62.17 97.581,62.32 RN4.4@97.583,62.32 ; RN4.3@98.05,63.59 97.583,63.59 97.433,63.44 97.433,62.47 RN4.4@97.583,62.32 ; IC35.3@98.675,57.425 99.675,57.425 100.4,58.15 C106.2@100.4,60.5 100.4,61.9 99.98,62.32 RN4.4@98.05,62.32 RN4.4@97.583,62.32
NetD10_2: D10.2 IC21.5 IC24.4 IC26.3 IC27.1 R53.1 R67.2 | length 64.5
  L1 w0.152: v1(115.782,20.382) 116.01,20.61 IC24.4@116.512,20.61 ; R53.1@117.037,27.5 117.388,27.149 117.388,26.676 118.118,25.947 ; v1(117.5,24.322) 117.5,25.329 118.118,25.947 ; IC26.3@119.187,25.947 118.118,25.947 ; IC21.5@122.734,46.298 125.402,46.298 125.8,45.9 126.389,45.9 ; D10.2@127.36,45.9 126.389,45.9 ; IC27.1@131.691,15.36 IC27.1@131.691,15.192 IC27.1@131.691,14.791 ; R67.2@133.325,14.567 131.915,14.567 IC27.1@131.691,14.791 ; 126.389,45.9 126.389,34.739 125.475,33.825 125.475,28.05 125.774,27.751 v1(125.774,25.215) 125.774,18.057 126.449,17.383 126.449,16.426 126.875,16 126.875,14.3 127.318,13.857 131.507,13.857 131.691,14.041 IC27.1@131.691,14.791
  L4 w0.152: v1(115.782,20.382) 116.325,20.925 116.325,23.147 v1(117.5,24.322) 118.393,25.215 v1(125.774,25.215)
NetIC1A_1: IC1A.1 R6A.1 RN1A.7 RN2A.7 | length 19.7
  L1 w0.203: RN1A.7@77.288,81.857 77.288,80.611 78.605,79.294 83.041,79.294 84.064,78.27 ; RN2A.7@84.064,76.455 84.064,78.27 ; IC1A.1@86.969,76.909 IC1A.1@86.969,77.506 ; R6A.1@90.603,77.486 90.073,77.486 89.853,77.706 89.793,77.706 88.815,78.684 87.421,78.684 86.969,78.232 IC1A.1@86.969,77.506 ; 84.064,78.27 84.103,78.309 85.134,78.309 85.937,77.506 IC1A.1@86.969,77.506
NetIC1A_2: IC1A.2 RN1A.2 RN1A.3 | length 15.2
  L1 w0.203: v1(77.269,78.155) 77.269,76.477 RN1A.2@77.288,76.457 ; RN1A.3@78.558,76.457 78.558,78.169 v1(78.569,78.18) ; IC1A.2@87.619,76.909 v1(87.619,78.205)
  L3 w0.203: v1(77.269,78.155) 78.569,78.155 78.573,78.151 84.514,78.151 84.671,78.309 85.067,78.309 85.199,78.177 87.591,78.177 v1(87.619,78.205)
NetIC1A_6: IC1A.6 RN2A.2 RN2A.3 | length 11.1
  L1 w0.203: RN2A.3@82.794,81.855 82.794,80.29 82.929,80.155 83.679,80.155 ; RN2A.2@84.064,81.855 83.929,81.72 83.929,80.405 83.679,80.155 ; IC1A.6@88.269,81.309 88.269,79.934 87.944,79.609 87.465,79.609 87.391,79.535 87.257,79.535 86.877,79.155 84.679,79.155 83.679,80.155
NetIC1A_7: IC1A.7 R12A.1 RN2A.6 | length 13
  L1 w0.203: RN2A.6@82.794,76.455 82.794,78.52 v1(82.929,78.655) ; v1(85.679,79.905) 87.294,79.905 87.619,80.23 IC1A.7@87.619,81.309 87.619,82.48 v1(87.594,82.505) ; v1(89.719,82.58) 89.815,82.676 R12A.1@90.603,82.676
  L3 w0.203: v1(82.929,78.655) 84.429,78.655 v1(85.679,79.905) ; v1(87.594,82.505) 89.644,82.505 v1(89.719,82.58)
NetIC1B_1: IC1B.1 R6B.1 RN1B.7 RN2B.7 | length 19.7
  L1 w0.203: RN1B.7@77.288,71.857 77.288,70.611 78.569,69.33 83.005,69.33 84.064,68.27 ; RN2B.7@84.064,66.455 84.064,68.27 ; IC1B.1@86.969,66.909 IC1B.1@86.969,67.506 ; R6B.1@90.603,67.486 90.073,67.486 89.853,67.706 89.793,67.706 88.815,68.684 87.421,68.684 86.969,68.232 IC1B.1@86.969,67.506 ; 84.064,68.27 84.103,68.309 85.067,68.309 85.665,67.711 85.665,67.67 85.829,67.506 IC1B.1@86.969,67.506
NetIC1B_2: IC1B.2 RN1B.2 RN1B.3 | length 15.2
  L1 w0.203: v1(77.269,68.155) 77.269,66.477 RN1B.2@77.288,66.457 ; RN1B.3@78.558,66.457 78.558,68.169 v1(78.569,68.18) ; IC1B.2@87.619,66.909 v1(87.619,68.205)
  L3 w0.203: v1(77.269,68.155) 79,68.155 79.003,68.151 84.514,68.151 84.671,68.309 85.067,68.309 85.199,68.177 87.591,68.177 v1(87.619,68.205)
NetIC1B_6: IC1B.6 RN2B.2 RN2B.3 | length 11.1
  L1 w0.203: RN2B.3@82.794,71.855 82.794,70.29 82.929,70.155 83.679,70.155 ; RN2B.2@84.064,71.855 83.929,71.72 83.929,70.405 83.679,70.155 ; IC1B.6@88.269,71.309 88.269,69.934 87.944,69.609 87.465,69.609 87.391,69.535 87.257,69.535 86.877,69.155 84.679,69.155 83.679,70.155
NetIC1B_7: IC1B.7 R12B.1 RN2B.6 | length 13
  L1 w0.203: RN2B.6@82.794,66.455 82.794,68.52 v1(82.929,68.655) ; v1(85.679,69.905) 87.294,69.905 87.619,70.23 87.619,72.48 v1(87.594,72.505) ; v1(89.719,72.58) 89.815,72.676 R12B.1@90.603,72.676
  L3 w0.203: v1(82.929,68.655) 84.429,68.655 v1(85.679,69.905) ; v1(87.594,72.505) 89.644,72.505 v1(89.719,72.58)
NetIC1C_1: IC1C.1 R6C.1 RN1C.7 RN2C.7 | length 19.7
  L1 w0.203: RN1C.7@77.301,61.813 77.301,60.567 78.577,59.291 83.013,59.291 84.077,58.227 ; RN2C.7@84.077,56.412 84.077,58.227 ; IC1C.1@86.982,56.865 IC1C.1@86.982,57.462 ; R6C.1@90.616,57.442 90.086,57.442 89.866,57.662 89.805,57.662 88.828,58.64 87.433,58.64 86.982,58.188 IC1C.1@86.982,57.462 ; 84.077,58.227 84.115,58.265 85.08,58.265 85.677,57.667 85.677,57.626 85.841,57.462 IC1C.1@86.982,57.462
NetIC1C_2: IC1C.2 RN1C.2 RN1C.3 | length 15.2
  L1 w0.203: v1(77.282,58.111) 77.282,56.433 RN1C.2@77.301,56.413 ; RN1C.3@78.571,56.413 78.571,58.057 v1(78.594,58.08) ; IC1C.2@87.632,56.865 v1(87.632,58.161)
  L3 w0.203: v1(77.282,58.111) 77.313,58.08 84.498,58.08 84.683,58.265 85.08,58.265 85.212,58.133 87.603,58.133 v1(87.632,58.161)
NetIC1C_6: IC1C.6 RN2C.2 RN2C.3 | length 11.1
  L1 w0.203: RN2C.3@82.807,61.812 82.807,60.247 82.942,60.112 83.692,60.112 ; RN2C.2@84.077,61.812 83.942,61.677 83.942,60.362 83.692,60.112 ; IC1C.6@88.282,61.265 88.282,59.89 87.957,59.565 87.477,59.565 87.404,59.491 87.27,59.491 86.89,59.112 84.692,59.112 83.692,60.112
NetIC1C_7: IC1C.7 R12C.1 RN2C.6 | length 13
  L1 w0.203: RN2C.6@82.807,56.412 82.807,58.477 v1(82.942,58.612) ; v1(85.692,59.862) 87.307,59.862 87.632,60.186 IC1C.7@87.632,61.265 87.632,62.436 v1(87.607,62.461) ; v1(89.732,62.536) 89.828,62.632 R12C.1@90.616,62.632
  L3 w0.203: v1(82.942,58.612) 84.442,58.612 v1(85.692,59.862) ; v1(87.607,62.461) 89.657,62.461 v1(89.732,62.536)
NetIC1D_1: IC1D.1 R6D.1 RN1D.7 RN2D.7 | length 19.7
  L1 w0.203: RN1D.7@77.288,51.857 77.288,50.611 78.599,49.3 83.035,49.3 84.064,48.27 ; RN2D.7@84.064,46.455 84.064,48.27 ; IC1D.1@86.969,46.909 IC1D.1@86.969,47.506 ; R6D.1@90.603,47.486 90.073,47.486 89.853,47.706 89.793,47.706 88.815,48.684 87.421,48.684 86.969,48.232 IC1D.1@86.969,47.506 ; 84.064,48.27 84.103,48.309 85.067,48.309 85.665,47.711 85.665,47.67 85.829,47.506 IC1D.1@86.969,47.506
NetIC1D_2: IC1D.2 RN1D.2 RN1D.3 | length 15.2
  L1 w0.203: v1(77.269,48.155) 77.269,46.477 RN1D.2@77.288,46.457 ; v1(78.544,48.18) 78.558,48.166 RN1D.3@78.558,46.457 ; IC1D.2@87.619,46.909 v1(87.619,48.205)
  L3 w0.203: v1(77.269,48.155) 78.544,48.155 78.548,48.151 84.514,48.151 84.671,48.309 85.067,48.309 85.199,48.177 87.591,48.177 v1(87.619,48.205)
NetIC1D_6: IC1D.6 RN2D.2 RN2D.3 | length 11.1
  L1 w0.203: RN2D.3@82.794,51.855 82.794,50.29 82.929,50.155 83.679,50.155 ; RN2D.2@84.064,51.855 83.929,51.72 83.929,50.405 83.679,50.155 ; IC1D.6@88.269,51.309 88.269,49.934 87.944,49.609 87.465,49.609 87.391,49.535 87.257,49.535 86.877,49.155 84.679,49.155 83.679,50.155
NetIC1D_7: IC1D.7 R12D.1 RN2D.6 | length 13
  L1 w0.203: RN2D.6@82.794,46.455 82.794,48.52 v1(82.929,48.655) ; v1(85.679,49.905) 87.294,49.905 87.619,50.23 87.619,52.48 v1(87.594,52.505) ; v1(89.719,52.58) 89.815,52.676 R12D.1@90.603,52.676
  L3 w0.203: v1(82.929,48.655) 84.429,48.655 v1(85.679,49.905) ; v1(87.594,52.505) 89.644,52.505 v1(89.719,52.58)
NetIC1E_1: IC1E.1 R6E.1 RN1E.7 RN2E.7 | length 19.7
  L1 w0.203: RN1E.7@77.288,41.857 77.288,40.611 78.559,39.34 82.995,39.34 84.064,38.27 ; RN2E.7@84.064,36.455 84.064,38.27 ; IC1E.1@86.969,36.909 IC1E.1@86.969,37.506 ; R6E.1@90.603,37.486 90.073,37.486 89.853,37.706 89.793,37.706 88.815,38.684 87.421,38.684 86.969,38.232 IC1E.1@86.969,37.506 ; 84.064,38.27 84.103,38.309 85.067,38.309 85.665,37.711 85.665,37.67 85.829,37.506 IC1E.1@86.969,37.506
NetIC1E_2: IC1E.2 RN1E.2 RN1E.3 | length 15.2
  L1 w0.203: v1(77.269,38.155) 77.269,36.477 RN1E.2@77.288,36.457 ; RN1E.3@78.558,36.457 78.558,38.169 v1(78.594,38.205) ; IC1E.2@87.619,36.909 v1(87.619,38.205)
  L3 w0.203: v1(77.269,38.155) 77.319,38.205 84.567,38.205 84.671,38.309 85.067,38.309 85.199,38.177 87.591,38.177 v1(87.619,38.205)
NetIC1E_6: IC1E.6 RN2E.2 RN2E.3 | length 11.1
  L1 w0.203: RN2E.3@82.794,41.855 82.794,40.29 82.929,40.155 83.679,40.155 ; RN2E.2@84.064,41.855 83.929,41.72 83.929,40.405 83.679,40.155 ; IC1E.6@88.269,41.309 88.269,39.934 87.944,39.609 87.465,39.609 87.391,39.535 87.257,39.535 86.877,39.155 84.679,39.155 83.679,40.155
NetIC1E_7: IC1E.7 R12E.1 RN2E.6 | length 13
  L1 w0.203: RN2E.6@82.794,36.455 82.794,38.027 82.896,38.129 82.896,38.65 v1(82.929,38.684) ; v1(85.679,39.905) 87.294,39.905 87.619,40.23 87.619,42.48 v1(87.594,42.505) ; v1(89.719,42.58) 89.815,42.676 R12E.1@90.603,42.676
  L3 w0.203: v1(82.929,38.684) 82.958,38.655 84.429,38.655 v1(85.679,39.905) ; v1(87.594,42.505) 89.644,42.505 v1(89.719,42.58)
NetIC1F_1: IC1F.1 R6F.1 RN1F.7 RN2F.7 | length 19.7
  L1 w0.203: RN1F.7@77.288,31.857 77.288,30.611 78.589,29.31 83.025,29.31 84.064,28.27 ; RN2F.7@84.064,26.455 84.064,28.27 ; IC1F.1@86.969,26.909 IC1F.1@86.969,27.506 ; R6F.1@90.603,27.486 90.073,27.486 89.853,27.706 89.793,27.706 88.815,28.684 87.421,28.684 86.969,28.232 IC1F.1@86.969,27.506 ; 84.064,28.27 84.103,28.309 85.067,28.309 85.665,27.711 85.665,27.67 85.829,27.506 IC1F.1@86.969,27.506
NetIC1F_2: IC1F.2 RN1F.2 RN1F.3 | length 15.2
  L1 w0.203: v1(77.269,28.155) 77.269,26.477 RN1F.2@77.288,26.457 ; RN1F.3@78.558,26.457 78.558,28.144 v1(78.594,28.18) ; IC1F.2@87.619,26.909 v1(87.619,28.205)
  L3 w0.203: v1(77.269,28.155) v1@78.594,28.155 ; v1@78.595,28.154 78.95,28.154 78.953,28.151 84.514,28.151 84.671,28.309 85.067,28.309 85.199,28.177 87.591,28.177 v1(87.619,28.205)
NetIC1F_6: IC1F.6 RN2F.2 RN2F.3 | length 11.1
  L1 w0.203: RN2F.3@82.794,31.855 82.794,30.29 82.929,30.155 83.679,30.155 ; RN2F.2@84.064,31.855 83.929,31.72 83.929,30.405 83.679,30.155 ; IC1F.6@88.269,31.309 88.269,29.934 87.944,29.609 87.465,29.609 87.391,29.535 87.257,29.535 86.877,29.155 84.679,29.155 83.679,30.155
NetIC1F_7: IC1F.7 R12F.1 RN2F.6 | length 13
  L1 w0.203: RN2F.6@82.794,26.455 82.794,28.52 v1(82.929,28.655) ; v1(85.679,29.905) 87.294,29.905 87.619,30.23 IC1F.7@87.619,31.309 87.619,32.48 v1(87.594,32.505) ; v1(89.719,32.58) 89.815,32.676 R12F.1@90.603,32.676
  L3 w0.203: v1(82.929,28.655) 84.429,28.655 v1(85.679,29.905) ; v1(87.594,32.505) 89.644,32.505 v1(89.719,32.58)
NetIC1G_1: IC1G.1 R6G.1 RN1G.7 RN2G.7 | length 19.7
  L1 w0.203: RN1G.7@77.288,21.857 77.288,20.611 78.587,19.312 83.023,19.312 84.064,18.27 ; RN2G.7@84.064,16.455 84.064,18.27 ; IC1G.1@86.969,16.909 IC1G.1@86.969,17.506 ; R6G.1@90.603,17.486 90.073,17.486 89.853,17.706 89.793,17.706 88.815,18.684 87.421,18.684 86.969,18.232 IC1G.1@86.969,17.506 ; 84.064,18.27 84.103,18.309 85.067,18.309 85.665,17.711 85.665,17.67 85.829,17.506 IC1G.1@86.969,17.506
NetIC1G_2: IC1G.2 RN1G.2 RN1G.3 | length 15.2
  L1 w0.203: v1(77.269,18.155) 77.298,18.126 77.298,17.207 77.269,17.178 77.269,16.477 RN1G.2@77.288,16.457 ; RN1G.3@78.558,16.457 78.558,18.116 v1(78.594,18.151) ; IC1G.2@87.619,16.909 v1(87.619,18.205)
  L3 w0.203: v1@77.273,18.151 84.514,18.151 84.671,18.309 85.067,18.309 85.199,18.177 87.591,18.177 v1(87.619,18.205)
NetIC1G_6: IC1G.6 RN2G.2 RN2G.3 | length 11.1
  L1 w0.203: RN2G.3@82.794,21.855 82.794,20.29 82.929,20.155 83.679,20.155 ; RN2G.2@84.064,21.855 83.929,21.72 83.929,20.405 83.679,20.155 ; IC1G.6@88.269,21.309 88.269,19.934 87.944,19.609 87.465,19.609 87.391,19.535 87.257,19.535 86.877,19.155 84.679,19.155 83.679,20.155
NetIC1G_7: IC1G.7 R12G.1 RN2G.6 | length 13
  L1 w0.203: RN2G.6@82.794,16.455 82.794,18.52 v1(82.929,18.655) ; v1(85.679,19.905) 87.294,19.905 87.619,20.23 87.619,22.48 v1(87.594,22.505) ; v1(89.719,22.58) 89.815,22.676 R12G.1@90.603,22.676
  L3 w0.203: v1(82.929,18.655) 84.429,18.655 v1(85.679,19.905) ; v1(87.594,22.505) 89.644,22.505 v1(89.719,22.58)
NetIC1H_1: IC1H.1 R6H.1 RN1H.7 RN2H.7 | length 19.7
  L1 w0.203: RN1H.7@77.288,11.857 77.288,10.611 78.615,9.284 83.05,9.284 84.064,8.27 ; RN2H.7@84.064,6.455 84.064,8.27 ; IC1H.1@86.969,6.909 IC1H.1@86.969,7.506 ; R6H.1@90.603,7.486 90.073,7.486 89.853,7.706 89.793,7.706 88.815,8.684 87.421,8.684 86.969,8.232 IC1H.1@86.969,7.506 ; 84.064,8.27 84.103,8.309 85.067,8.309 85.665,7.711 85.665,7.67 85.829,7.506 IC1H.1@86.969,7.506
NetIC1H_2: IC1H.2 RN1H.2 RN1H.3 | length 15.2
  L1 w0.203: v1(77.269,8.155) 77.269,6.477 RN1H.2@77.288,6.457 ; RN1H.3@78.558,6.457 78.558,8.091 v1(78.619,8.151) ; IC1H.2@87.619,6.909 v1(87.619,8.205)
  L3 w0.203: v1(77.269,8.155) 78.615,8.155 v1(78.619,8.151) 84.514,8.151 84.671,8.309 85.067,8.309 85.199,8.177 87.591,8.177 v1(87.619,8.205)
NetIC1H_6: IC1H.6 RN2H.2 RN2H.3 | length 11.1
  L1 w0.203: RN2H.3@82.794,11.855 82.794,10.29 82.929,10.155 83.679,10.155 ; RN2H.2@84.064,11.855 83.929,11.72 83.929,10.405 83.679,10.155 ; IC1H.6@88.269,11.309 88.269,9.934 87.944,9.609 87.465,9.609 87.391,9.535 87.257,9.535 86.877,9.155 84.679,9.155 83.679,10.155
NetIC1H_7: IC1H.7 R12H.1 RN2H.6 | length 13
  L1 w0.203: RN2H.6@82.794,6.455 82.794,8.52 v1(82.929,8.655) ; v1(85.679,9.905) 87.294,9.905 87.619,10.23 87.619,12.48 v1(87.594,12.505) ; v1(89.719,12.58) 89.815,12.676 R12H.1@90.603,12.676
  L3 w0.203: v1(82.929,8.655) 84.429,8.655 v1(85.679,9.905) ; v1(87.594,12.505) 89.644,12.505 v1(89.719,12.58)
NetIC2A_7: IC2A.7 RN1A.1 | length 9.2
  L1 w0.203: IC2A.7@73.775,81.967 73.775,82.815 74.105,83.145 74.723,83.145 75.075,82.793 75.075,79.11 76.018,78.167 RN1A.1@76.018,76.457
NetIC2B_7: IC2B.7 RN1B.1 | length 9.2
  L1 w0.203: IC2B.7@73.775,71.967 73.775,72.815 74.105,73.145 74.723,73.145 75.075,72.793 75.075,69.11 76.018,68.167 RN1B.1@76.018,66.457
NetIC2C_7: IC2C.7 RN1C.1 | length 9.2
  L1 w0.203: IC2C.7@73.788,61.923 73.788,62.771 74.118,63.101 74.736,63.101 75.088,62.749 75.088,59.066 76.031,58.123 RN1C.1@76.031,56.413
NetIC2D_7: IC2D.7 RN1D.1 | length 9.2
  L1 w0.203: IC2D.7@73.775,51.967 73.775,52.815 74.105,53.145 74.723,53.145 75.075,52.793 75.075,49.11 76.018,48.167 RN1D.1@76.018,46.457
NetIC2E_7: IC2E.7 RN1E.1 | length 9.2
  L1 w0.203: IC2E.7@73.775,41.967 73.775,42.815 74.105,43.145 74.723,43.145 75.075,42.793 75.075,39.11 76.018,38.167 RN1E.1@76.018,36.457
NetIC2F_7: IC2F.7 RN1F.1 | length 9.2
  L1 w0.203: IC2F.7@73.775,31.967 73.775,32.815 74.105,33.145 74.723,33.145 75.075,32.793 75.075,29.11 76.018,28.167 RN1F.1@76.018,26.457
NetIC2G_7: IC2G.7 RN1G.1 | length 9.2
  L1 w0.203: IC2G.7@73.775,21.967 73.775,22.815 74.105,23.145 74.723,23.145 75.075,22.793 75.075,19.11 76.018,18.167 RN1G.1@76.018,16.457
NetIC2H_7: IC2H.7 RN1H.1 | length 9.2
  L1 w0.203: IC2H.7@73.775,11.967 73.775,12.815 74.105,13.145 74.723,13.145 75.075,12.793 75.075,9.11 76.018,8.167 RN1H.1@76.018,6.457
NetIC19_9: IC19.9 IC20.14 | length 79.9
  L1 w0.127: IC20.14@102.399,9.737 v1(103.501,9.737) ; IC19.9@102.399,74.95 v1(103.501,74.95)
  L4 w0.152: v1(103.501,9.737) 103.821,10.056 106.677,10.056 111.769,15.148 111.769,18.32 110.02,20.069 106.061,20.069 103.899,22.232 103.899,27.743 102.307,29.335 102.307,34.118 102.25,34.175 102.25,40.9 102.475,41.125 102.475,44.3 102.894,44.719 102.894,58.866 103.075,59.047 103.075,59.59 102.916,59.749 102.916,61.363 104.038,62.485 104.038,74.413 v1(103.501,74.95)
NetIC21_2: IC21.2 R51.1 R52.2 | length 3.4
  L1 w0.25: R51.1@113.993,49.069 114.224,48.838 IC21.2@117.334,48.838
NetIC22_4: IC22.4 IC23.4 R54.1 R55.2 | length 7.6
  L1 w0.152: R54.1@116.644,16.35 116.977,16.683 116.977,17.363 R55.2@117.114,17.5 117.114,17.482 117.328,17.268 117.781,17.268 117.87,17.268 118.069,17.069 118.579,17.069 118.778,16.87 118.778,15.993 119.263,15.508 119.263,13.738 119.094,13.569 IC23.4@118.394,13.569
NetIC24_3: IC24.3 IC26.4 R61.1 R63.2 | length 9.3
  L1 w0.25: v1(115.861,21.11) IC24.3@116.512,21.11
  L1 w0.254: R63.2@115,27.5 R61.1@115,26.025 115.078,25.947 IC26.4@116.487,25.947 116.762,25.947 116.91,25.799 v1(116.91,24.742)
  L4 w0.25: v1(115.861,21.11) 115.861,23.693 v1(116.91,24.742)
NetIC25_2: IC25.2 R57.2 | length 4.2
  L1 w0.203: IC25.2@152.154,80.405 153.709,78.85 R57.2@155.694,78.85
NetIC25_6: IC25.6 R56.1 R58.2 | length 6.7
  L1 w0.203: R58.2@126.813,74.099 126.813,72.311 R56.1@126.944,72.18 128.055,72.18 129.294,73.419 IC25.6@129.294,75.325
NetIC27_2: IC27.2 R60.1 | length 4.2
  L1 w0.152: IC27.2@130.421,15.192 130.421,16.146 130.625,16.35 131.869,16.35 132.511,16.992 R60.1@132.511,17.772
NetIC28_5: IC28.5 R66.1 R68.2 | length 3.4
  L1 w0.305: R68.2@141.141,60.82 142.391,59.57 R66.1@142.641,59.57 ; R68.2@141.142,61.069 IC28.5@141.142,62.415
NetIC28_9: IC28.9 L7.1 | length 3.3
  L1 w0.33: IC28.9@143.242,63.915 145.245,63.915 L7.1@146.165,64.835
NetIC29_4: IC29.4 IC30.4 R70.1 R71.2 | length 8.3
  L1 w0.152: R71.2@112.52,45 113.95,45 R70.1@114.15,44.8 114.4,44.55 IC29.4@115.9,44.55 116.085,44.55 116.284,44.351 116.284,43.474 116.769,42.989 116.769,41.219 116.6,41.05 IC30.4@115.9,41.05
NetIC31_5: IC31.5 R72.1 R74.2 | length 2.4
  L1 w0.127: IC31.5@137.691,61.02 138.421,61.02 R72.1@138.921,60.52 R74.2@138.921,61.52
NetIC31_9: IC31.9 L9.1 | length 3.6
  L1 w0.127: L9.1@132.313,60.295 L9.1@133.002,59.606 ; IC31.9@135.504,59.606 IC31.9@135.591,59.52
  L1 w0.254: L9.1@133.002,59.606 IC31.9@135.504,59.606
NetIC32_2: IC32.2 R73.1 R75.2 | length 2.7
  L1 w0.25: R73.1@118.6,31.364 R75.2@119.546,31.364 119.675,31.493 120.048,31.493 120.309,31.754 120.921,31.754 IC32.2@121.096,31.929
NetIC35_2: IC35.2 R83.1 RN3.6 | length 14.9
  L1 w0.3: IC35.2@98.675,58.075 97.475,58.075 95.974,56.574 95.974,53.375 96.274,53.075 96.35,53.075 97.15,52.275 100.125,52.275 100.76,51.64 RN3.6@103.625,51.64
NetIC35_6: IC35.6 RN3.7 | length 7
  L1 w0.3: IC35.6@103.075,57.425 102.057,57.425 101.881,57.249 101.881,53.534 102.505,52.91 RN3.7@103.625,52.91
NetIC36_23: IC36.23 R76.2 T9.3 | length 50.2
  L1 w0.127: IC36.23@101.864,33.49 101.864,32.625 102.339,32.15 102.682,32.15 102.985,31.847 102.985,29.965 103.25,29.7 v1(103.263,29.7)
  L1 w0.15: v1(104.975,26.275) 104.975,22.7 106.05,21.625 108.575,21.625 109,22.05 109,26.625 110.925,28.55 112.75,28.55 112.996,28.796 113.904,28.796 114.25,28.45 119.525,28.45 119.902,28.827 122.002,28.827 122.224,29.049 122.224,33.466 121.69,34 117.125,34 116.1,35.025 T9.3@116.1,35.65 116.05,35.6 115.413,35.6 115.325,35.512 115.325,34.925 115.175,34.775 114.525,34.775 R76.2@114.5,34.8
  L4 w0.127: v1(103.263,29.7) 103.302,29.7 104.975,28.027 v1(104.975,26.275)
NetIC36_25: IC36.25 R77.2 | length 2.7
  L1 w0.254: IC36.25@102.864,33.49 102.864,32.923 103.382,32.405 103.384,32.405 103.821,31.968 103.821,31.728 104.144,31.405 R77.2@104.194,31.405
NetIC36_43: IC36.43 R78.1 | length 2.4
  L1 w0.254: IC36.43@102.364,41.34 102.364,42.553 103.004,43.193 103.004,43.258 103.15,43.404 R78.1@103.195,43.404
NetL1A_3: L1A.3 R8A.2 R9A.1 | length 6.1
  L1 w0.203: R8A.2@55.564,78.288 55.564,79.113 55.755,79.304 L1A.3@58.26,79.304 58.836,79.88 59.92,79.88 R9A.1@60.352,80.312
NetL1A_4: L1A.4 R1A.2 R2A.1 | length 5.7
  L1 w0.203: R1A.2@55.564,82.86 55.564,82.029 55.749,81.844 L1A.4@58.26,81.844 60.268,81.844 R2A.1@60.352,81.76
NetL1B_3: L1B.3 R8B.2 R9B.1 | length 6.1
  L1 w0.203: R8B.2@55.564,68.288 55.564,69.113 55.755,69.304 L1B.3@58.26,69.304 58.836,69.88 59.92,69.88 R9B.1@60.352,70.312
NetL1B_4: L1B.4 R1B.2 R2B.1 | length 5.7
  L1 w0.203: R1B.2@55.564,72.86 55.564,72.029 55.749,71.844 L1B.4@58.26,71.844 60.268,71.844 R2B.1@60.352,71.76
NetL1C_3: L1C.3 R8C.2 R9C.1 | length 6.1
  L1 w0.203: R8C.2@55.577,58.244 55.577,59.069 55.767,59.26 L1C.3@58.273,59.26 58.849,59.836 59.933,59.836 R9C.1@60.365,60.268
NetL1C_4: L1C.4 R1C.2 R2C.1 | length 5.7
  L1 w0.203: R1C.2@55.577,62.816 55.577,61.985 55.762,61.8 L1C.4@58.273,61.8 60.281,61.8 R2C.1@60.365,61.716
NetL1D_3: L1D.3 R8D.2 R9D.1 | length 6.1
  L1 w0.203: R8D.2@55.564,48.288 55.564,49.113 55.755,49.304 L1D.3@58.26,49.304 58.836,49.88 59.92,49.88 R9D.1@60.352,50.312
NetL1D_4: L1D.4 R1D.2 R2D.1 | length 5.7
  L1 w0.203: R1D.2@55.564,52.86 55.564,52.029 55.749,51.844 L1D.4@58.26,51.844 60.268,51.844 R2D.1@60.352,51.76
NetL1E_3: L1E.3 R8E.2 R9E.1 | length 6.1
  L1 w0.203: R8E.2@55.564,38.288 55.564,39.113 55.755,39.304 L1E.3@58.26,39.304 58.836,39.88 59.92,39.88 R9E.1@60.352,40.312
NetL1E_4: L1E.4 R1E.2 R2E.1 | length 5.7
  L1 w0.203: R1E.2@55.564,42.86 55.564,42.029 55.749,41.844 L1E.4@58.26,41.844 60.268,41.844 R2E.1@60.352,41.76
NetL1F_3: L1F.3 R8F.2 R9F.1 | length 6.1
  L1 w0.203: R8F.2@55.564,28.288 55.564,29.113 55.755,29.304 L1F.3@58.26,29.304 58.836,29.88 59.92,29.88 R9F.1@60.352,30.312
NetL1F_4: L1F.4 R1F.2 R2F.1 | length 5.7
  L1 w0.203: R1F.2@55.564,32.86 55.564,32.029 55.749,31.844 L1F.4@58.26,31.844 60.268,31.844 R2F.1@60.352,31.76
NetL1G_3: L1G.3 R8G.2 R9G.1 | length 6.1
  L1 w0.203: R8G.2@55.564,18.288 55.564,19.113 55.755,19.304 L1G.3@58.26,19.304 58.836,19.88 59.92,19.88 R9G.1@60.352,20.312
NetL1G_4: L1G.4 R1G.2 R2G.1 | length 5.7
  L1 w0.203: R1G.2@55.564,22.86 55.564,22.029 55.749,21.844 L1G.4@58.26,21.844 60.268,21.844 R2G.1@60.352,21.76
NetL1H_3: L1H.3 R8H.2 R9H.1 | length 6.1
  L1 w0.203: R8H.2@55.564,8.288 55.564,9.113 55.755,9.304 L1H.3@58.26,9.304 58.836,9.88 59.92,9.88 R9H.1@60.352,10.312
NetL1H_4: L1H.4 R1H.2 R2H.1 | length 5.7
  L1 w0.203: R1H.2@55.564,12.86 55.564,12.029 55.749,11.844 L1H.4@58.26,11.844 60.268,11.844 R2H.1@60.352,11.76
NetLD1_2: LD1.2 R45.1 | length 1.3
  L1 w0.25: LD1.2@112.05,76.465 112.303,76.212 113.078,76.212 R45.1@113.221,76.07
NetLD2_2: LD2.2 R47.1 | length 2
  L1 w0.25: LD2.2@179.375,1.271 179.65,1.546 179.65,2.071 179.977,2.398 R47.1@179.977,3.001
NetLD3_2: LD3.2 R48.1 | length 1.5
  L1 w0.203: LD3.2@112,52.975 112.586,53.561 113.061,53.561 R48.1@113.2,53.7
NetLD4_2: LD4.2 R49.1 | length 2.6
  L1 w0.152: LD4.2@112.05,16.5 112.625,16.5 113.625,17.5 R49.1@114.23,17.5
NetLD5_2: LD5.2 R50.1 | length 1.4
  L1 w0.4: R50.1@132.625,44.8 LD5.2@132.625,46.2
NetLD6_2: LD6.2 R85.1 | length 2.3
  L1 w0.25: LD6.2@112.05,31.163 112.725,30.488 112.725,30.225 113.45,29.5 R85.1@113.5,29.5
NetLD7_2: LD7.2 R87.1 | length 1.5
  L1 w0.5: R87.1@147.52,56.9 LD7.2@149,56.9
NetLD8_2: LD8.2 R88.1 | length 1.4
  L1 w0.3: R88.1@150.5,44.8 150.525,44.825 LD8.2@150.525,46.2
NetLD9_2: LD9.2 R89.1 | length 1.6
  L1 w0.25: LD9.2@170.775,1.271 170.928,1.423 170.928,2.378 R89.1@171.221,2.671
NetLD10_2: LD10.2 R90.1 | length 1.5
  L1 w0.25: LD10.2@162.15,1.271 162.15,2.356 R90.1@162.465,2.671
NetLD11_2: LD11.2 R91.2 | length 1.5
  L1 w0.15: LD11.2@112.05,36.7 112.375,36.375 112.755,36.375 113.18,35.95 R91.2@113.2,35.95
NetLD12_2: LD12.2 R92.1 | length 1.1
  L1 w0.254: LD12.2@112.05,25.725 R92.1@112.05,26.83
NetLD13_2: LD13.2 R93.1 | length 1.3
  L1 w0.25: LD13.2@112.05,62.635 112.303,62.888 113.078,62.888 R93.1@113.221,63.03
NetLD14_1: LD14.1 T_T1.3 | length 16.9
  L1 w0.3: LD14.1@-0.9,82.4 0.4,81.1 2.29,81.1 2.925,81.735 2.925,82.839 4.751,84.665 5.211,84.665 6.187,85.641 6.187,89.012 6.99,89.815 T_T1.3@9.275,89.815
NetLD14_2: LD14.2 T_R3.1 | length 18.6
  L1 w0.3: LD14.2@1.64,82.4 4.475,85.235 4.975,85.235 5.616,85.877 5.616,90.327 6.857,91.568 12.303,91.568 12.85,91.021 T_R3.1@12.85,90.272
NetLD14_4: LD14.4 T_R1.1 | length 7
  L1 w0.3: LD14.4@6.72,82.4 6.72,87.63 7.428,88.338 7.428,88.702 7.728,89.002 T_R1.1@7.75,89.002
NetP5_25: P5.25 R41.1 R86.1 | length 120.2
  L1 w0.762: P5.25@24.2,60.69 24.2,78.462 26.663,80.925 v2(27.725,80.925) ; v2(110.444,86.38) R41.1@110.444,82.18 R86.1@111.944,82.18
  L3 w0.762: v2(27.725,80.925) 29.1,82.3 29.1,83.571 37,91.471 87.582,91.471 95.375,83.679 99.854,83.679 102.555,86.38 v2(110.444,86.38)
NetP5_26: P5.26 R42.1 | length 125.5
  L1 w0.762: P5.26@21.66,60.69 21.66,78.585 25.825,82.75 v2(27.73,82.75) ; R42.1@113.444,82.18 v2(113.444,86.38)
  L3 w0.762: v2(27.73,82.75) 27.73,84.261 36.227,92.758 88.115,92.758 95.908,84.966 99.321,84.966 102.022,87.667 112.157,87.667 v2(113.444,86.38)